# Altium PCB PCB1.PcbDoc
Units mil, origin at the board's own origin, x right, y up, seen from the top; angles counter-clockwise.
Board outline 6000 x 4000 mil, 2 copper layers (Top Layer, Bottom Layer); 25 components, 16 nets, 72 pads, 1 vias.
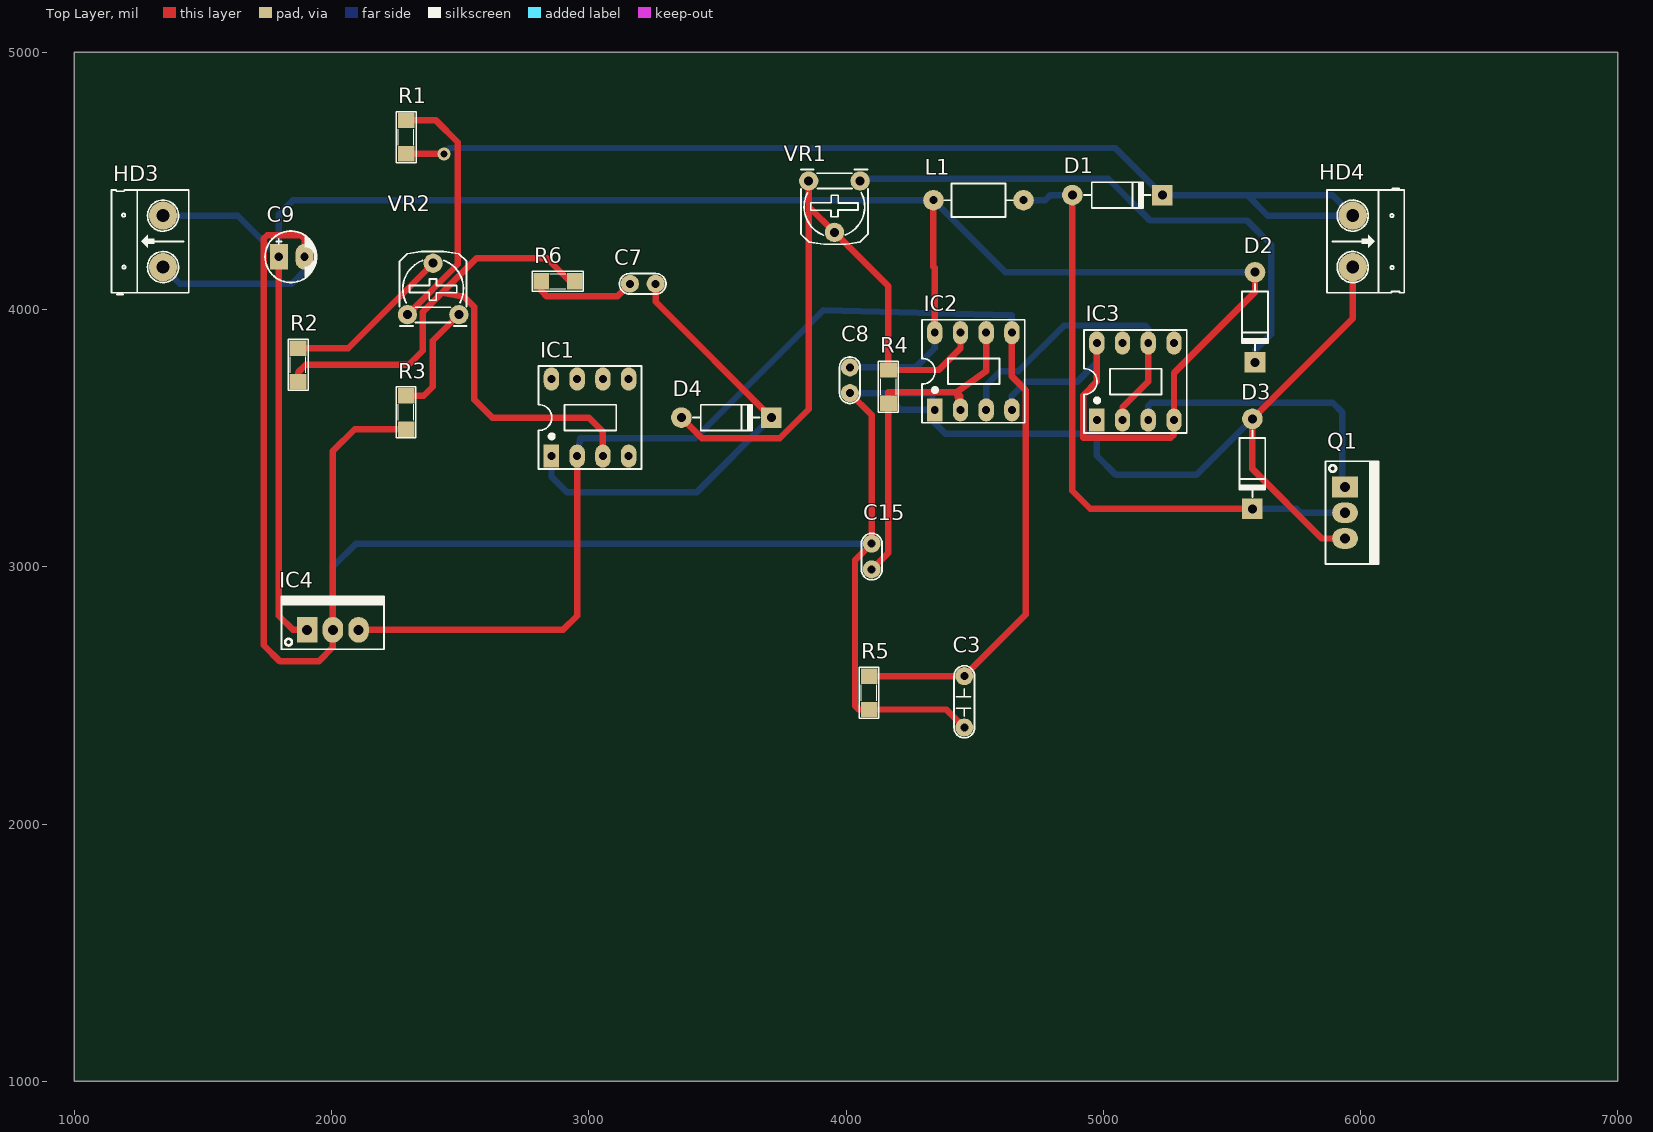
[diagram p0: Top Layer view]
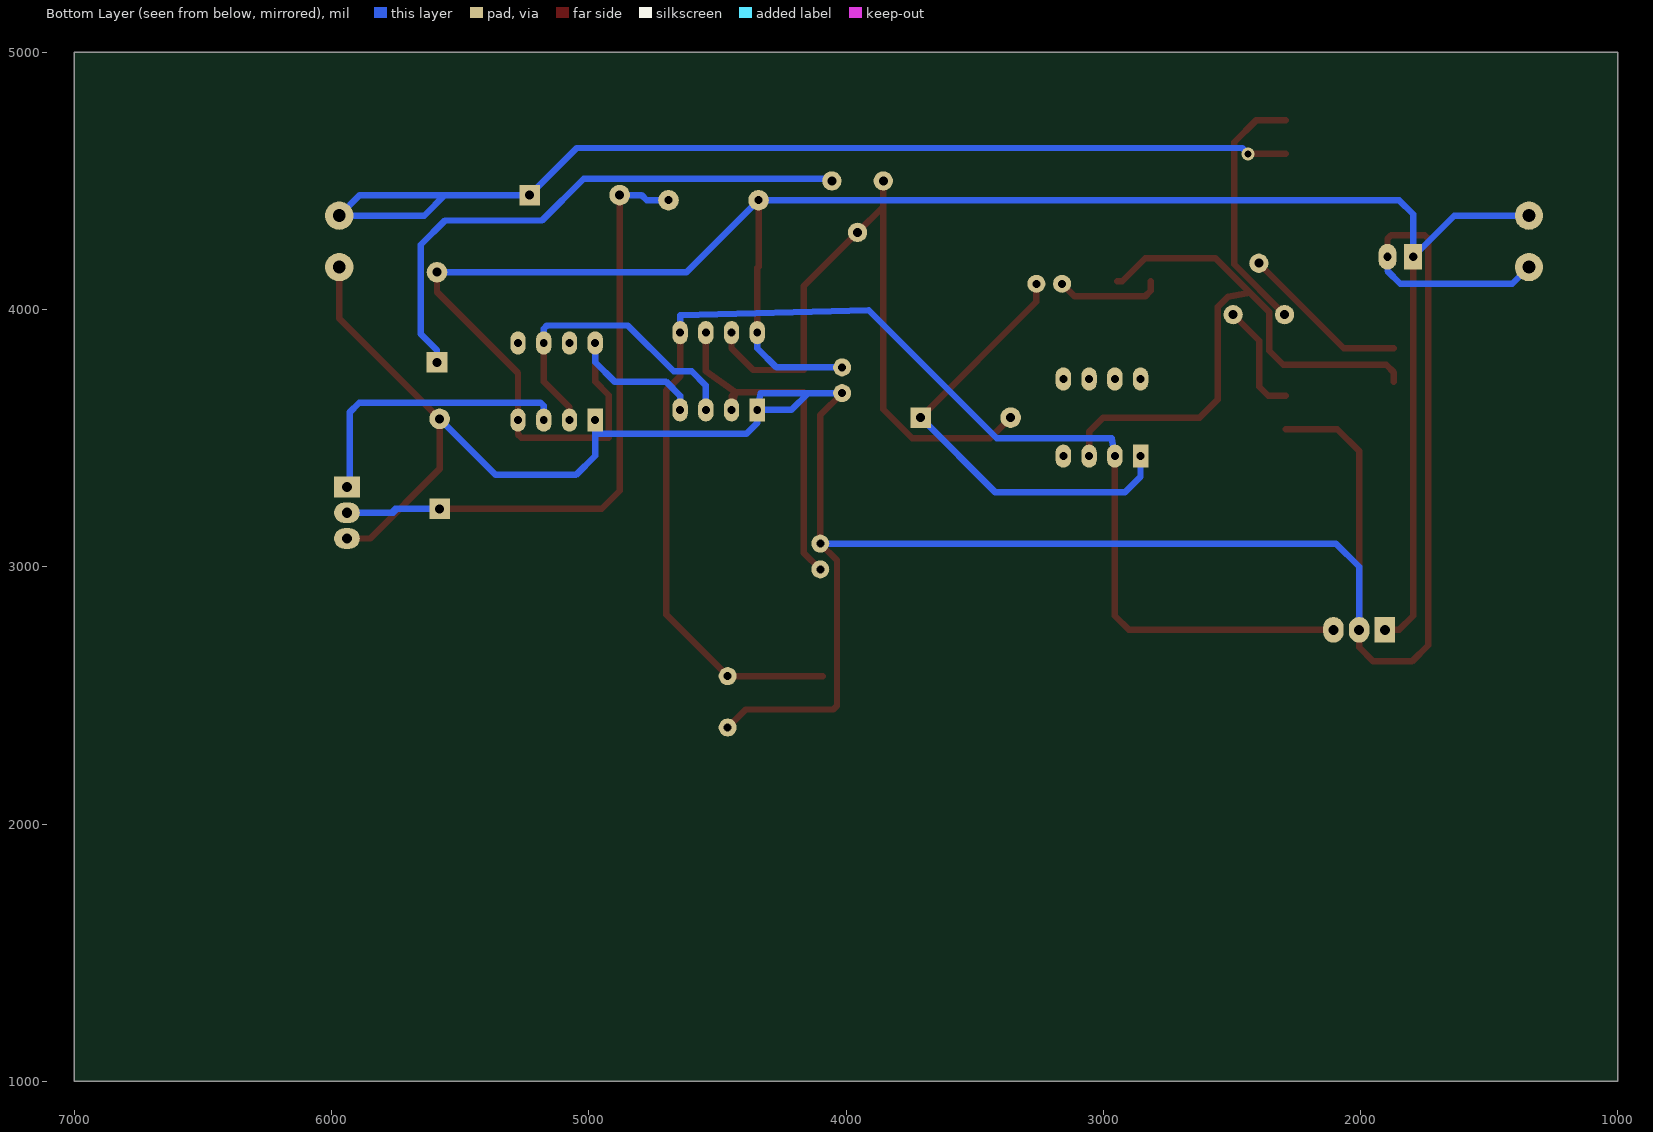
[diagram p1: Bottom Layer view, seen from below]
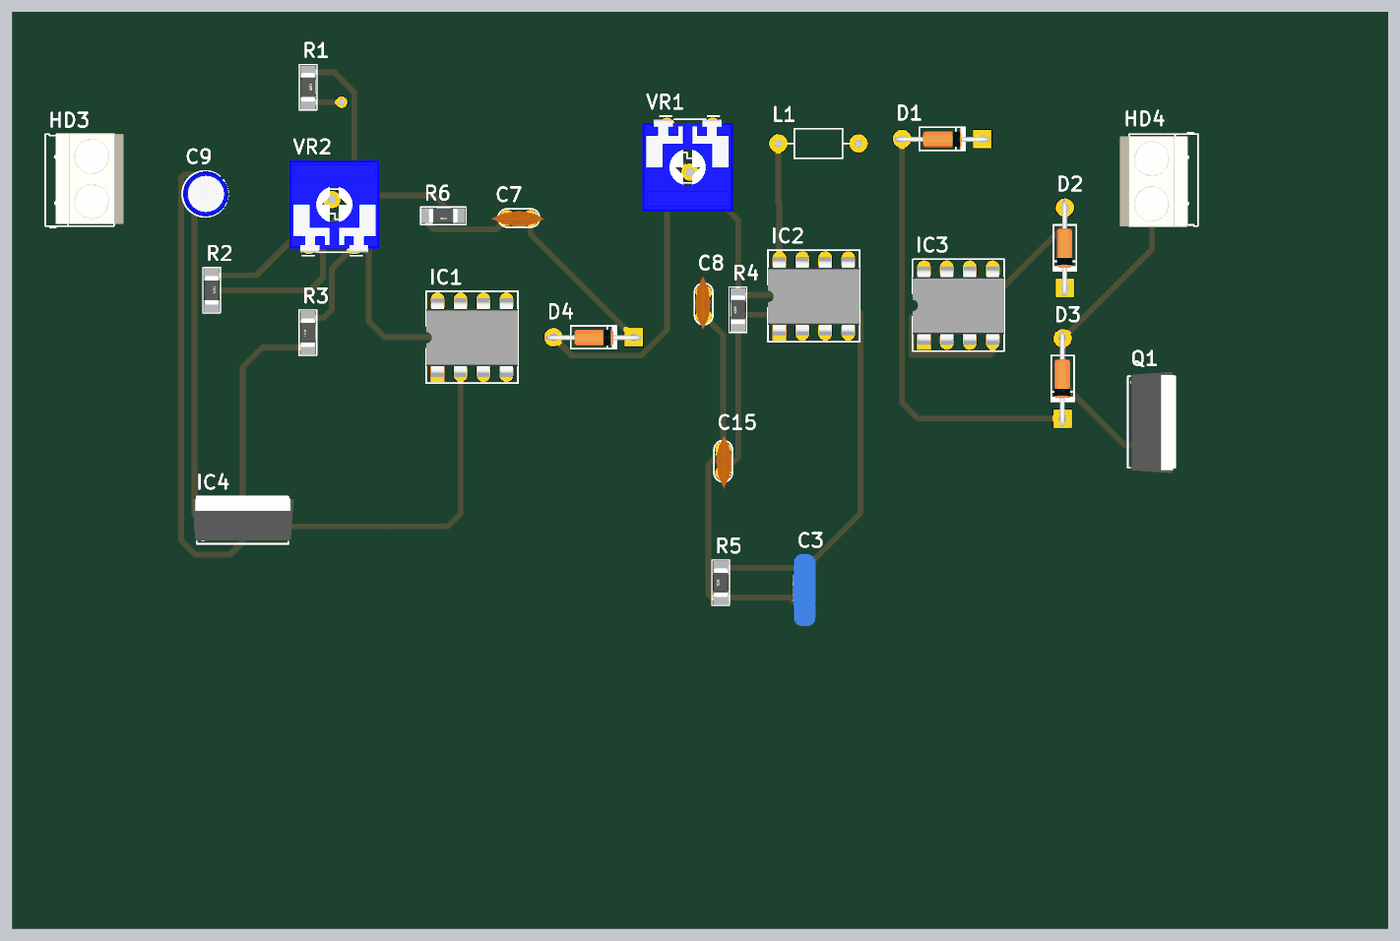
[diagram p2: 3D render of the assembled board from above, using the file's embedded part models]

## Layer stack, top to bottom
Top Solder: solder mask 0.4, Solder Resist, Dk 3.5
Top Layer: signal copper 1.4
Dielectric 1: dielectric 12.6, FR-4, Dk 4.8
Bottom Layer: signal copper 1.4
Bottom Solder: solder mask 0.4, Solder Resist, Dk 3.5

## Board outline
1000,1000 7000,1000 7000,5000 1000,5000

## Design rules (kind name [scope] priority, off if disabled: settings)
Clearance [All] p1: gap=10 ignorepadtopadclearanceinfootprint=FALSE except(0: Arc-Hole Track-Hole SMDPad-Hole THPad-Hole Via-Hole Fill-Hole Poly-Hole Region-Hole Text-Hole)
PolygonConnect [All] p1: connectstyle=Relief reliefconductorwidth=10 reliefentries=4 polygonreliefangle="90 Angle" airgapwidth=10
RoomDefinition Sheet1 [InComponentClass('Sheet1')] p1: confinementstyle=ConfineIn formatcopy=TRUE lockcomponents=FALSE outline 7045,1060 13560,1060 13560,1615 7045,1615
RoutingVias [All] p1: holewidth=28 width=50 viastyle="Through Hole" minholewidth=28 minwidth=50 maxholewidth=28 maxwidth=50
SolderMaskExpansion [All] p1: expansion=4
Width [All] p1: maxlimit=35 minlimit=15 preferedwidth=25
30 further rules are at their usual default settings.

## Components (designator, comment, footprint, x,y, rotation, side; value= is the part's Value field where it differs from the comment)
C3 "104" CN2 4460,2375 r90 top value=0.1uF
C7 "104" CN1 3260,4100 r180 top value=100pF
C8 "104" CN1 4015,3675 r90 top value=100pF
C9 "470uF" CP1/2 1795,4205 r0 top value=10uF/50V
C15 "103" CN1 4100,3090 r270 top value=100pF
D1 "1N4007" D1A 4880,4445 r180 top
D2 "1N4007" D1A 5590,4145 r90 top
D3 "1N4007" D1A 5580,3575 r90 top
D4 "1N4007" D1A 3360,3580 r180 top
HD3 "SOLAR" HED2 1345,4165 r90 top value="Header 2"
HD4 "BATTERRY" HED2 5970,4365 r270 top value="Header 2"
IC1 "LM358" DIP8/W0.3 2855,3430 r0 top
IC2 "LM555" DIP8/W0.3 4345,3610 r0 top
IC3 "LM555" DIP8/W0.3 4975,3570 r0 top
IC4 "LM7805" QTO-220 1905,2755 r0 top
L1 "150mH" L/0.4 4340,4425 r0 top value="150 mH"
Q1 "IRF840" QTO-220 5940,3310 r270 top
R1 "22k" SM-RES-1206 2290,4735 r270 top value="R1/4W - 1K"
R2 "10k" SM-RES-1206 1870,3850 r270 top value="R1/4W - 1K"
R3 "10k" SM-RES-1206 2290,3535 r90 top value="R1/4W - 1K"
R4 "10k" SM-RES-1206 4165,3635 r90 top value="R1/4W - 1K"
R5 "1k" SM-RES-1206 4090,2445 r90 top value="R1/4W - 1K"
R6 "100k" SM-RES-1206 2945,4110 r180 top value="R1/4W - 1K"
VR1 "100K" VR 4055,4500 r180 top value="VR 10K"
VR2 "10K" VR 2295,3980 r0 top value="VR 10K"

## Footprints (in the part's own frame and the unit in brackets; to place one, negate y for a bottom-side part, rotate by r counter-clockwise, add the part's x,y. Pads: shape width x height; smd on the part's side, far side on the other; paste and mask are expansions set on the pad)
CN1 [mil]
  round 70 hole 31: 1(0,0) 2(100,0)
  silkscreen extent -40,-40 141,40, body extent -60,-30 170,37, height 265
CN2 [mil]
  round 70 hole 31: 1(0,0) 2(200,0)
  silkscreen extent -40,-40 240,40, body extent -54,-44 260,55, height 407
CP1/2 [mil] "Tu hoa < 22uF/16>50V"
  rect 70x100 hole 32: 1(0,0)
  oval 70x100 hole 32: 2(100,0)
  silkscreen extent -53,-100 147,100, body extent -49,-99 149,99, height 287
D1A [mil] "Diode 1A, W 100mil, L 350mil"
  round 80 hole 35: 1(0,0)
  rect 80x80 hole 35: 2(-350,0)
  silkscreen extent -305,-50 -45,50, body extent -386,-33 34,36, height 84
DIP8/W0.3 [mil] "8 PIN, W 300mil, Pin to pin 100mil"
  rect 60x90 hole 31: 1(0,0)
  oval 60x90 hole 31: 2(100,0) 3(200,0) 4(300,0) 5(300,300) 6(200,300) 7(100,300) 8(0,300)
  silkscreen extent -50,-50 350,350, body extent -50,-40 350,336, height 201
HED2 [mil] "Header 2, 2 pin, hight 300mil, Pin to Pin 200, Colour Green"
  round 110 hole 50: 1(0,0) 2(200,0)
  silkscreen extent -106,-100 300,200, body extent -92,-140 302,155, height 394
L/0.4 [mil] "Inductor , 2 Pin, L 350mil, W 150 mil"
  round 80 hole 31: 1(0,0) 2(350,0)
  silkscreen extent 40,-65 310,65
QTO-220 [mil] "TO-220 - 1-2-3"
  rect 80x100 hole 39: 1(0,0)
  oval 80x100 hole 39: 2(100,0) 3(200,0)
  silkscreen extent -100,-76 300,130, body extent -119,-64 322,121, height 755
SM-RES-1206 [mil]
  rect 60x65 smd: 1(0,0) 2(130,0)
  silkscreen extent -34,-38 164,39, body extent 2,-31 128,32, height 40
VR [mil] "Resistor Variable"
  round 75 hole 35: 1(0,0) 2(100,200) 3(200,0)
  silkscreen extent -31,-44 231,246, body extent -87,-30 307,372, height 165

## Part data
C3: library part CN2, "Cap np 104 => 105pF"
C7 C8 C15: library part CN1, "Cap np  1pF - 472pF"
C9: library part CP1, "Cap P  0,1uF < 22uF , 16 - 50V", Description 1="10 => 220uF/6,3V/10V - 10uF => 100uF/16V", Description 2="0,1uF => 33uF/50V - 10uF => 22uF/63V", Description 3="0,47uF => 10uF/100V"
D1 D2 D3 D4: library part D1A, "Diode 1A"
HD3 HD4: library part Hed2, "Header 2 (Green)"
IC1: "Low-Power Dual Operational Amplifier"
IC2 IC3: "Timer"
IC4: library part LM78xx, "On ap +, from + 5 to + 24VDC", =LM7808
L1: library part L1, "Inductor"
Q1: "MOSFET N - CHANNEL 500V - 0.75 - 8A - TO-220"
R1 R2 R3 R4 R5 R6: library part R, "Resistor 1/4W"
VR1 VR2: library part VR, "Var Resistor"

## Via types
v1: diameter 50, hole 28, Top Layer to Bottom Layer, 1 vias

## Nets (pads, with @x,y where several pads share a name; then routed paths per layer and width w, separated by ;. In a path a pad name is that pad's centre, name@x,y a point inside that pad or via, vN(x,y) a via of type N, cw(c..) or ccw(c..) an arc to the next point about the centre after c; other vN are vias at no path point)
GND: C3.1 C8.1 C9.2 C15.1 D3.1 HD3.1 HD4.2 IC2.1 IC3.1 IC4.2 Q1.3 R3.1 R5.1 | length 11577.5
  Top Layer w25: C9.2 1895,4275 1881,4289 1750,4289 1737,4276 1737,2695 1800,2632 1950,2632 2005,2687 IC4.2 2005,3450 2090,3535 R3.1 ; C8.1 4100,3590 C15.1 4035,3025 4035,2460 4050,2445 R5.1 4390,2445 C3.1 ; Q1.3 5850,3110 5580,3380 D3.1 5970,3965 HD4.2
  Bottom Layer w25: HD3.1 1410,4100 1845,4100 1895,4150 C9.2 ; IC4.2 2005,3000 2095,3090 C15.1 ; C8.1 4147,3675 ; IC3.1 4975,3516.5 ; D3.1 5362,3357 5050,3357 4975,3432 4975,3516.5 ; 4147,3675 4332.5,3675 IC2.1 ; 4147,3675 4212,3610 IC2.1 ; IC2.1 4345,3559 4387.5,3516.5 4975,3516.5
NetC3_2: C3.2 IC1.2 IC2.5 IC4.3 R5.2 | length 5340.1
  Top Layer w25: IC4.3 2900,2755 2955,2810 IC1.2 ; R5.2 C3.2 4698,2813 4698,3687 4645,3740 IC2.5
  Bottom Layer w25: IC1.2 2967.5,3500 3414,3500 3911,3997 4645,3977 IC2.5
NetC7_1: C7.1 D4.2 IC1.1 | length 1787.2
  Top Layer w25: C7.1 3260,4030 D4.2
  Bottom Layer w25: IC1.1 2855,3350 2916,3289 3419,3289 D4.2
NetC7_2: C7.2 R6.2 | length 411.1
  Top Layer w25: R6.2 2815,4073.5 2837.5,4051 3111,4051 C7.2
NetC8_2: C8.2 C9.1 D2.1 HD3.2 IC2.4 IC2.8 IC3.4 IC3.8 IC4.1 L1.1 | length 9103.9
  Top Layer w25: C9.1 1795,2810 1850,2755 IC4.1 ; L1.1 4340,4167 4345,4162 IC2.8 ; IC3.8 4975,3720 4922,3667 4922,3502 5262.5,3502 5275,3514.5 IC3.4 5275,3753 5590,4068 D2.1
  Bottom Layer w25: HD3.2 1635,4365 C9.1 1795,4370 1850,4425 L1.1 4620,4145 D2.1 ; C8.2 4270,3775 4345,3850 IC2.8 ; IC2.4 4645,3665 4700,3720 4900,3720 4975,3795 IC3.8
NetC15_2: C15.2 IC2.2 IC2.6 R4.1 | length 1415.2
  Top Layer w25: C15.2 4165,3055 R4.1 4165,3678 4429.5,3678 ; IC2.6 4545,3760 4429.5,3678 ; 4429.5,3678 IC2.2 4445,3662.5 4429.5,3678
NetD1_1: D1.1 D3.2 L1.2 Q1.2 | length 2471.7
  Top Layer w25: D1.1 4880,3295 4950,3225 D3.2
  Bottom Layer w25: L1.2 4775,4425 4795,4445 D1.1 ; D3.2 5745,3225 ; Q1.2 5767,3210 ; 5745,3225 5752,3225 5767,3210 ; 5745,3225 5760,3210 5767,3210
NetD1_2: D1.2 HD4.1 R1.2 | length 4241.6
  Top Layer w25: R1.2 v1(2437,4605)
  Bottom Layer w25: v1(2437,4605) 2460,4628 5047,4628 D1.2 5560,4445 ; 5560,4445 5890,4445 HD4.1 5640,4365 5560,4445
NetD2_2: D2.2 VR1.1 | length 2190.4
  Bottom Layer w25: VR1.1 4063,4508 5020,4508 5182,4346 5559,4346 5653,4252 5653,3905 5590,3842 D2.2
NetD4_1: D4.1 IC2.7 R4.2 VR1.2 VR1.3 | length 2601.1
  Top Layer w25: D4.1 3440,3500 3743,3500 3855,3612 3855,4400 ; VR1.3 3855,4400 ; IC2.7 4445,3850 4360,3765 R4.2 4165,4090 VR1.2 3855,4400
NetIC1_3: IC1.3 R2.2 R6.1 | length 2568.9
  Top Layer w25: R2.2 1870,3755 1900,3785 2300,3785 2355,3840 2355,3990.5 2429.75,4065.25 ; R6.1 2926,4110 2837,4199 2563.5,4199 2429.75,4065.25 ; IC1.3 3055,3525 3000,3580 2625,3580 2555,3650 2555,4010 2515,4050 2429.75,4065.25
NetIC2_3: IC2.3 IC3.2 IC3.6 | length 1223.6
  Top Layer w25: IC3.2 5075,3620 5175,3720 IC3.6
  Bottom Layer w25: IC2.3 4545,3705 4600,3760 4670,3760 4848,3938 5162.5,3938 5175,3925.5 IC3.6
NetIC3_3: IC3.3 Q1.1 | length 1131.4
  Bottom Layer w25: IC3.3 5175,3625.5 5187.5,3638 5892,3638 5930,3600 5930,3310 Q1.1
NetR1_1: R1.1 VR2.1 | length 987.4
  Top Layer w25: R1.1 2406,4735 2491,4650 2491,4176 VR2.1
NetR2_1: R2.1 VR2.2 | length 661.7
  Top Layer w25: R2.1 2065,3850 VR2.2
NetR3_2: R3.2 VR2.3 | length 440.3
  Top Layer w25: R3.2 2359,3665 2394,3700 2394,3879 VR2.3
pads on no net: IC1.4 IC1.5 IC1.6 IC1.7 IC1.8 IC3.5 IC3.7